# EAGLE board uc4h airspeed v0401 (EAGLE 7.5.0)
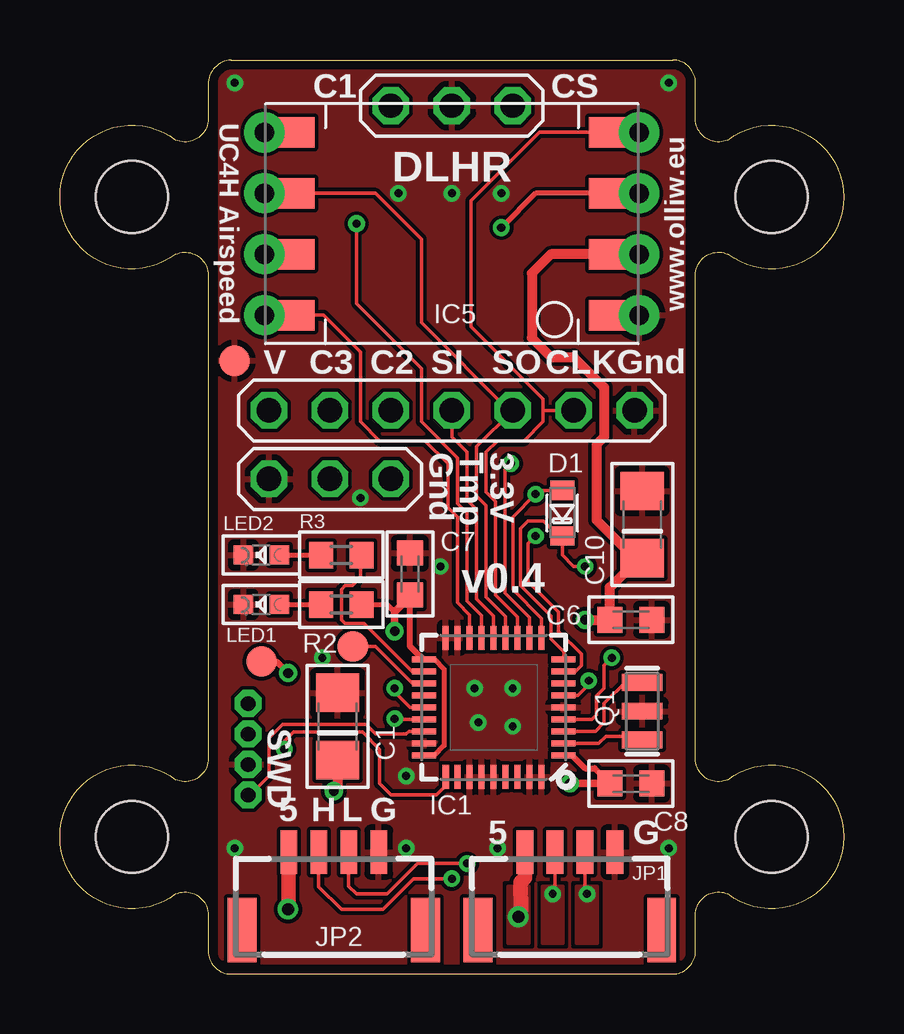
[diagram p0: board, top side]
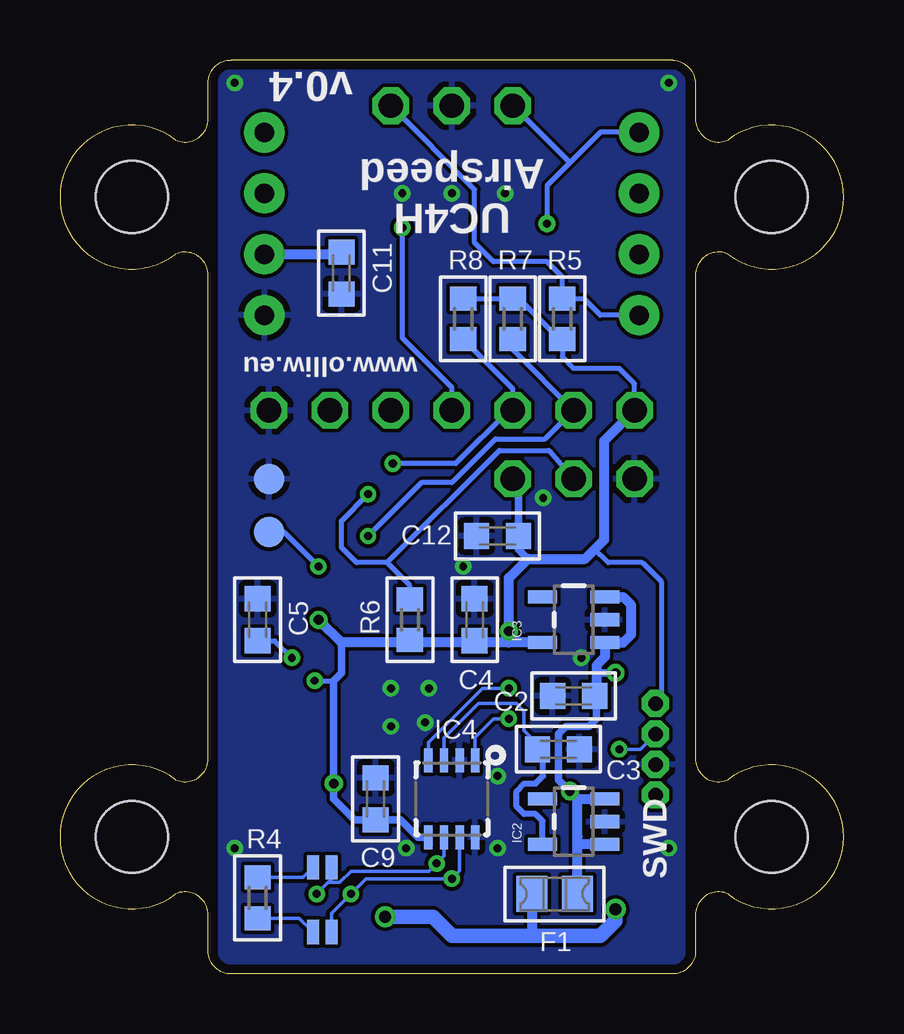
[diagram p1: board, bottom side, seen from below]

Size 32.67 x 38.1 mm. Coordinates in mm from the lower left corner, seen from the top.
Outline: 7.13,0 25.54,0 arc90 26.5,0.95 26.5,2.46 arc-114 27.84,3.33 arc255 27.84,8.1 arc-114 26.5,8.97 26.5,29.13 arc-114 27.84,30 arc255 27.84,34.77 arc-114 26.5,35.64 26.5,37.15 arc90 25.54,38.1 7.13,38.1 arc90 6.18,36.99 6.18,35.64 arc-114 4.83,34.77 arc255 4.83,30 arc-114 6.18,29.13 6.18,8.97 arc-114 4.83,8.1 arc255 4.83,3.33 arc-114 6.18,2.46 6.18,0.95 arc90 7.13,0
Copper layers (1*16): Top 0.0356mm / dielectric 1.5011mm / Bottom 0.0356mm
Design rules "ow-oshpark-2layer": minimum track width 6mil, minimum drill 13mil, track to track 6mil, track to pad 6mil, pad to pad 6mil, via to via 6mil, smd to smd 6mil, copper to edge 15mil, drill to drill 6mil, minimum pad ring 7mil, minimum via ring 7mil, stop-mask expansion 2.5mil, vias tented up to drill 26mil, thermal gap 10mil
Holes 3 mm at 3,32.38 29.67,32.38 3,5.71 29.67,5.71

## Footprints (pad centres in the part's own frame; a part is rotated, then mirrored left to right if it is on the bottom)
C1206 = smd 1.6 x 1.8: 1 -1.4,0; 2 1.4,0
C0603K = smd 1.05 x 1.08: 1 -0.875,0; 2 0.875,0
SOD110-R = smd 0.8 x 1: A 0.95,0; C -0.95,0
FUSE-0805 = smd 1.3 x 1.5: 1 -0.95,0; 2 0.95,0
VFQFPN36 = smd 1 x 0.25: 1 -2.9,2; 2 -2.9,1.5; 3 -2.9,1; 4 -2.9,0.5; 5 -2.9,0; 6 -2.9,-0.5; 7 -2.9,-1; 8 -2.9,-1.5; 9 -2.9,-2; 19 2.9,-2; 20 2.9,-1.5; 21 2.9,-1; 22 2.9,-0.5; 23 2.9,0; 24 2.9,0.5; 25 2.9,1; 26 2.9,1.5; 27 2.9,2 | smd 0.25 x 1: 10 -2,-2.9; 11 -1.5,-2.9; 12 -1,-2.9; 13 -0.5,-2.9; 14 0,-2.9; 15 0.5,-2.9; 16 1,-2.9; 17 1.5,-2.9; 18 2,-2.9; 29 1.5,2.9; 30 1,2.9; 31 0.5,2.9; 32 0,2.9; 33 -0.5,2.9; 34 -1,2.9; 35 -1.5,2.9; 36 -2,2.9 | smd 0.27 x 1: 28 2,2.9
SOT23-5 = smd 0.55 x 1.2: 1 -0.95,-1.3; 2 0,-1.3; 3 0.95,-1.3; 4 0.95,1.3; 5 -0.95,1.3
HVSON8 = smd 1 x 0.35: 1 -1.6,0.975; 2 -1.6,0.325; 3 -1.6,-0.325; 4 -1.6,-0.975; 5 1.6,-0.975; 6 1.6,-0.325; 7 1.6,0.325; 8 1.6,0.975
DLHR-8 = drill 0.813 pad 1.676: 1 -7.811,3.81; 2 -7.811,1.27; 3 -7.811,-1.27; 4 -7.811,-3.81; 5 7.811,-3.81; 6 7.811,-1.27; 7 7.811,1.27; 8 7.811,3.81 | smd 2.54 x 1.27: P$9 -6.985,3.81; P$10 -6.985,1.27; P$11 -6.985,-1.27; P$12 -6.985,-3.81; P$13 6.985,-3.81; P$14 6.985,-1.27; P$15 6.985,1.27; P$16 6.985,3.81
SM04B-GHS-TB = smd 0.7 x 1.8: 1 -1.875,4.6; 2 -0.625,4.6; 3 0.625,4.6; 4 1.875,4.6 | smd 1.2 x 2.7: FIT@1 -3.825,1.35; FIT@2 3.825,1.35
CHIPLED_0603 = smd 0.8 x 0.8: A 0,-0.75; C 0,0.75
RESONATOR-SMD = smd 0.7 x 1.7: 1 -1.2,0; 2 0,0; 3 1.2,0
R0603 = smd 1 x 1.1: 1 -0.85,0; 2 0.85,0
SJ_2S-NO = smd 0.508 x 1.016: 1 -0.381,0; 2 0.381,0
PINHEAD_3X1 = drill 1.016 octagon: 1 0,0; 2 0,-2.54; 3 0,-5.08
PINHEAD_7X1 = drill 1.016 octagon: 1 0,0; 2 0,-2.54; 3 0,-5.08; 4 0,-7.62; 5 0,-10.16; 6 0,-12.7; 7 0,-15.24
4X1_1P27_OCT_BILEX = drill 0.61 pad 1.118 octagon: 1 0,0; 2 0,-1.27; 3 0,-2.54; 4 0,-3.81
B1,27 = smd 1.27 x 1.27: TP 0,0

## Placement (x,y rotation side)
C1  10u/20V  [C1206]  11.57,10.32 90 top
C2  100n  [C0603K]  11.26,11.59 180 bottom
C3  1u  [C0603K]  11.89,9.37 0 bottom
C4  1u  [C0603K]  15.38,14.76 90 bottom
C5  100n  [C0603K]  24.43,14.76 90 bottom
C6  100n  [C0603K]  23.8,14.76 0 top
C7  100n  [C0603K]  14.59,16.67 90 top
C8  100n  [C0603K]  23.8,7.94 0 top
C9  100n  [C0603K]  19.51,7.3 90 bottom
C10  10u/10V  [C1206]  24.27,18.73 90 top
C11  100n  [C0603K]  20.94,29.21 270 bottom
C12  100n  [C0603K]  14.43,18.26 180 bottom
D1  BAT54J  [SOD110-R]  20.94,19.21 90 top
F1  0ZCK0020FF2G  [FUSE-0805]  12.05,3.33 180 bottom
IC1  STM32F103T8  [VFQFPN36]  18.08,11.11 180 top
IC2  MIC5219-5.0YM5-TR  [SOT23-5]  11.26,6.35 90 bottom
IC3  MIC5219-3.3YM5-TR  [SOT23-5]  11.26,14.76 90 bottom
IC4  TJA1051TK/3  [HVSON8]  16.34,7.3 270 bottom
IC5  DLHRDLHR-8  [DLHR-8]  16.34,31.27 180 top
JP1  JST-GH-4  [SM04B-GHS-TB]  21.26,0.48 0 top
JP2  JST-GH-4  [SM04B-GHS-TB]  11.41,0.48 0 top
LED1  red  [CHIPLED_0603]  8.4,15.4 90 top
LED2  green  [CHIPLED_0603]  8.4,17.46 90 top
Q1  CSTCE8M00G55-R0  [RESONATOR-SMD]  24.27,10.95 90 top
R2  4.7k  [R0603]  11.73,15.4 180 top
R3  1k  [R0603]  11.73,17.46 180 top
R4  120  [R0603]  24.43,3.17 90 bottom
R5  10k  [R0603]  11.73,27.3 270 bottom
R6  4.7k  [R0603]  18.08,14.76 270 bottom
R7  10k  [R0603]  13.8,27.3 90 bottom
R8  10k  [R0603]  15.86,27.3 90 bottom
SJ2  [SJ_2S-NO]  21.73,1.75 0 bottom
SJ3  [SJ_2S-NO]  21.73,4.45 0 bottom
SPI1  PINHEAD_3X1  [PINHEAD_3X1]  13.8,36.2 90 top
SPI2  PINHEAD_7X1  [PINHEAD_7X1]  8.72,23.5 90 top
SWD  PH4  [4X1_1P27_OCT_BILEX]  7.84,11.27 0 top
TEMP  PINHEAD_3X1  [PINHEAD_3X1]  13.8,20.64 270 top
TP1  TPB1,27  [B1,27]  12.21,13.65 0 top
TP2  TPB1,27  [B1,27]  7.29,25.56 0 top
TP3  TPB1,27  [B1,27]  8.4,13.02 0 top
TP4  TPB1,27  [B1,27]  23.96,18.41 0 bottom
TP5  TPB1,27  [B1,27]  23.96,20.64 0 bottom

## Library data of the parts
C1-C12 R2-R8 = rcl
D1 = diode
F1 IC4 IC5 JP1 JP2 SPI1 SPI2 SWD TEMP = # stdlib
IC1 = # stm32
IC2 IC3 Q1 SJ2 SJ3 = # SparkFun2
LED1 LED2 = led
TP1-TP5 = testpad

## Nets
3.3V: C4.1 C6.1 C7.1 C8.1 C9.1 C10.1 C11.1 C12.1 IC1.1 IC1.6 IC1.19 IC1.27 IC3.5 IC4.5 IC5.2 R2.1 R5.2 R6.2 R7.2 R8.2 SPI2.1 SWD.1 TEMP.1
5V: C3.1 IC2.5 IC4.3
A1: IC1.33
A2: IC1.34
CAN-5V: C1.1 C2.1 F1.1 IC2.1 IC2.3 IC3.1 IC3.3 TP3.TP
CAN-PWR-IN: F1.2 JP1.1 JP2.1
CANH: IC4.7 JP1.2 JP2.2 SJ2.2
CANL: IC4.6 JP1.3 JP2.3 SJ3.2
CANRX: IC1.23 IC4.4
CANTX: IC1.24 IC4.1
CS: IC1.16 IC5.8 R5.1 SPI1.3
CS2: IC1.11 R8.1 SPI2.3
CS3: IC1.8 R7.1 SPI2.2
EOC: IC1.15 IC5.5 SPI1.1
GND: C1.2 C2.2 C3.2 C4.2 C5.2 C6.2 C7.2 C8.2 C9.2 C10.2 C11.2 C12.2 IC1.5 IC1.17 IC1.18 IC1.26 IC1.30 IC1.31 IC1.32 IC1.35 IC1.36 IC2.2 IC3.2 IC4.2 IC4.8 IC5.1 JP1.4 JP2.4 LED1.C LED2.C Q1.2 SPI1.2 SPI2.7 SWD.3 TEMP.3 TP2.TP TP5.TP
LED: IC1.20 R3.1
MISO: IC1.13 IC5.6 SPI2.5
MOSI: IC1.14 IC5.3 SPI2.4
N$1: C5.1 IC1.4
N$2: LED2.A R3.2
N$4: R4.1 SJ2.1
N$5: IC1.2 Q1.1
N$6: IC1.3 Q1.3
N$7: R4.2 SJ3.1
N$9: LED1.A R2.2
RX1: IC1.22
RX2: D1.A IC1.10 R6.1 TEMP.2
SCK: IC1.12 IC5.4 SPI2.6
SWCLK: IC1.28 SWD.2
SWDIO: IC1.25 SWD.4
TX1: IC1.21 TP1.TP
TX2: D1.C IC1.9 TP4.TP

## Tracks (layer width: path | path; a pad name or v marks a point on that pad's centre or on a via)
3.3V  (via drill 0.33, 0.4)
  Top 0.152: 23,14.85 C6.1 | 14.51,15.4 C7.1 14.35,15.48 | IC1.6 21.6,11.61 22.05,12.06 v22.05,12.22
  Top 0.203: IC1.19 15.61,13.11 16.02,12.7 16.02,9.53 15.61,9.11 IC1.27 | R2.1 13.64,15.4 13.95,15.08
  Top 0.254: IC1.19 15.02,13.22 14.59,13.65 C7.1 | IC1.1 21.35,9.11 21.89,8.57 22.29,8.57 C8.1
  Top 0.305: v13.95,14.29 13.95,15.08 14.35,15.48 | C8.1 v21.26,7.94 | 22.84,14.76 C6.1
  Top 0.406: v21.89,14.76 22.84,14.76 | C6.1 22.92,16.11 24.11,17.31 C10.1 23.96,17.33 22.37,18.92 22.37,22.07 22.69,22.38 22.69,24.45 21.42,25.72 20.46,25.72 19.67,26.51 19.67,29.21 20.46,30 IC5.2
  Bottom 0.203: 15.54,13.81 15.22,13.81 | SWD.1 7.6,11.51 7.6,16.35 8.4,17.14 9.83,17.14 10.38,17.7 | v22.05,12.22 21.26,12.22 | R6.2 18.08,13.81 | SPI2.1 8.72,24.61 9.35,25.24 11.26,25.24 11.73,25.72 R5.2 11.99,26.45 12.05,26.67 13.48,28.1 13.58,27.94 R7.2 R8.2
  Bottom 0.305: 15.22,13.81 15.47,13.97 C4.1 | IC4.5 17.75,5.7 18.48,6.43 C9.1 20.38,6.43 21.26,7.3 v21.26,7.94 21.26,12.22 20.94,12.54 20.94,13.81 | TEMP.1 13.56,20.4 C12.1 13.56,17.7 13.16,17.3 | 21.34,30 C11.1
  Bottom 0.406: IC3.5 13.95,13.81 | 13.95,13.81 15.22,13.81 | 15.54,13.81 18.08,13.81 20.94,13.81 v21.89,14.76 | 13.95,13.81 v13.95,14.29 13.95,16.51 13.16,17.3 10.78,17.3 10.38,17.7 9.99,18.1 9.99,22.23 SPI2.1 | IC5.2 21.34,30
5V
  Bottom 0.152: IC4.3 16.66,9.84 15.22,11.27 13.64,11.27 13.32,10.95 13.32,10.16 12.68,9.53 12.68,9.29 C3.1
  Bottom 0.254: IC2.5 12.56,6.38 12.84,6.67 13.32,6.67 13.64,6.99 13.64,7.62 13.32,7.94 12.84,7.94 12.53,8.26 12.53,9.29
  Bottom 0.305: 12.53,9.29 C3.1
CAN-5V  (via drill 0.4)
  Top 0.254: TP3.TP 9.03,13.02 v9.51,12.54
  Top 0.406: C1.1 11.57,7.78 v11.41,7.62
  Bottom 0.305: IC2.1 10.62,5.4 | IC2.3 | v11.41,7.62 11.89,8.1 11.89,10 11.57,10.32 10.62,10.32 10.3,10.64 10.3,11.35 C2.1 10.3,11.51 | v9.51,12.54 10.3,12.54
  Bottom 0.406: IC3.3 9.19,15.71 8.87,15.4 8.87,14.13 9.19,13.81 IC3.1 9.96,13.21 10.3,12.86 10.3,12.54 10.3,11.51 | IC2.1 11.1,5.4 | 11.1,5.4 11.1,5.71 11.1,7.3 | 11.1,7.3 IC2.3 | v11.41,7.62 11.1,7.3 | F1.1 10.94,3.33 11.1,3.49 11.1,5.4
CAN-PWR-IN  (via drill 0.5)
  Top 0.152: v9.51,2.7 9.54,2.67
  Top 0.61: 9.54,2.67 JP2.1 | JP1.1 19.38,4 19.19,3.81 19.22,2.65 v19.11,2.38
  Bottom 0.406: F1.2 13,1.75 13,1.59
  Bottom 0.61: v19.11,2.38 17.13,2.38 16.34,1.59 13,1.59 10.14,1.59 9.51,2.22 v9.51,2.7
  pour Top (no thermals): 19.55,3.65 18.68,3.65 18.68,1.27 19.55,1.27
CANH  (via drill 0.33)
  Top 0.152: JP2.2 10.79,3.64 11.73,2.7 13.48,2.7 14.75,3.97 v16.34,3.97 | JP1.2 20.63,3.42 v20.54,3.33
  Bottom 0.152: IC4.7 16.01,4.29 v16.34,3.97 19.91,3.97 v20.54,3.33 21.35,2.52 SJ2.2
  pour Top (no thermals): 20.11,3.65 20.98,3.65 20.98,1.27 20.11,1.27
CANL  (via drill 0.33)
  Top 0.152: JP2.3 12.04,3.66 12.37,3.33 13.64,3.33 14.91,4.6 v16.97,4.6 | JP1.3 21.88,3.48 v21.97,3.33
  Bottom 0.152: IC4.6 16.66,4.93 v16.97,4.6 17.29,4.29 20.54,4.29 21.02,3.81 21.49,3.81 | 21.49,3.81 v21.97,3.33 | SJ3.2 21.35,3.95 21.49,3.81
  pour Top (no thermals): 21.53,3.65 22.41,3.65 22.41,1.27 21.53,1.27
CANRX  (via drill 0.33)
  Top 0.152: IC1.23 14.59,11.11 13.95,11.75 v13.95,11.91
  Bottom 0.152: IC4.4 17.31,9.66 15.07,11.91 v13.95,11.91
CANTX  (via drill 0.33)
  Top 0.152: IC1.24 13.98,10.61 v13.95,10.64
  Bottom 0.152: IC4.1 15.36,9.87 14.59,10.64 v13.95,10.64
CS
  Top 0.152: IC1.16 17.08,14.97 16.57,15.48 16.57,19.05 16.18,19.45 16.18,21.27 15.22,22.23 13.32,22.23 12.53,23.02 12.53,25.93 10.99,27.46 IC5.8
  Bottom 0.203: IC5.8 10.14,27.46 10.84,28.16 R5.1 11.73,29.05 12.37,29.69 14.59,29.69 15.38,30.48 15.38,32.7 SPI1.3
CS2  (via drill 0.34)
  Top 0.152: IC1.11 19.58,14.85 18.56,15.88 18.56,21.03 v18.8,21.27
  Bottom 0.203: v18.8,21.27 16.18,21.27 13.95,23.5 SPI2.3 13.8,24.39 R8.1
CS3  (via drill 0.33)
  Top 0.152: IC1.8 21.49,12.61 21.73,12.86 21.73,13.34 20.78,14.29 20.78,15.08 19.51,16.35 19.51,17.94 v19.83,18.26
  Bottom 0.203: v19.83,18.26 17.61,20.48 16.34,20.48 14.51,22.3 12.45,22.3 SPI2.2 13.8,26.04 R7.1
EOC  (via drill 0.34)
  Top 0.152: IC1.15 17.58,14.95 16.97,15.56 16.97,19.21 16.57,19.61 16.57,21.51 15.07,23.02 15.07,25.24 12.37,27.94 v12.37,31.27
  Bottom 0.203: IC5.5 10.14,35.08 11.41,33.81 | 11.41,33.81 12.37,32.86 v12.37,31.27 | SPI1.1 11.41,33.81
GND  (via drill 0.33)
  other vias: 17.29,11.91 17.45,10.48 18.88,10.32 18.88,11.91 14.43,8.26 14.43,5.24 18.24,5.24 7.29,5.24 25.38,5.24 10.94,13.18 14.11,32.54 18.4,32.54 7.29,37.15 25.38,37.15 15.86,16.99 12.53,19.84 16.34,32.54
  pour Bottom (isolate 0.152, rank 6): 6.65,37.78 26.02,37.78 26.02,0.16 6.65,0.16
  pour Top (isolate 0.152, rank 6): 6.65,37.78 26.02,37.78 26.02,0.16 6.65,0.16
LED
  Top 0.152: R3.1 12.53,17.41 12.53,16.51 12.21,16.19 11.89,16.19 11.73,16.03 11.73,14.76 11.89,14.61 12.68,14.61 14.68,12.61 IC1.20
MISO
  Top 0.152: IC1.13 18.58,14.9 17.76,15.72 17.76,19.53 17.37,19.92 17.37,21.99 SPI2.5 18.72,23.5 15.07,27.15 15.07,30.64 13.16,32.54 IC5.6
MOSI  (via drill 0.34)
  Top 0.152: IC1.14 18.08,14.92 17.37,15.64 17.37,19.37 16.97,19.76 16.97,21.75 16.34,22.38 SPI2.4
  Top 0.203: IC5.3 19.83,32.54 v18.4,31.11
  Bottom 0.203: SPI2.4 16.34,24.45 18.4,26.51 v18.4,31.11
N$1  (via drill 0.33)
  Top 0.152: IC1.4 22.19,10.61 22.37,10.79 22.37,11.59 22.69,11.91 22.69,12.86 v23,13.18
  Bottom 0.203: C5.1 23.72,13.89 v23,13.18
N$2
  Top 0.203: LED2.A R3.2
N$4
  Bottom 0.152: R4.1 22.69,2.33 SJ2.1
N$5
  Top 0.152: IC1.2 22.46,9.61 22.76,9.91 24.11,9.91 Q1.1
N$6
  Top 0.152: IC1.3 22.32,10.11 22.69,10.48 22.69,11.27 23.64,12.22 23.96,11.91 24.18,12.06 Q1.3
N$7
  Bottom 0.152: R4.2 22.53,4.03 SJ3.1
N$9
  Top 0.203: LED1.A R2.2
RX2  (via drill 0.33)
  Top 0.152: IC1.10 20.08,14.83 18.88,16.03 18.88,19.05 v19.83,20 19.99,20.16 21.1,20.16 D1.A
  Bottom 0.203: TEMP.2 12.29,21.83 14.35,21.83 19.03,17.14 | 19.03,17.14 20.3,17.14 20.94,17.78 20.94,18.89 v19.83,20 | R6.1 18.08,16.19 19.03,17.14
SCK
  Top 0.152: IC1.12 19.08,14.88 18.16,15.8 18.16,19.68 17.76,20.08 17.76,21.75 18.24,22.23 19.35,22.23 20.15,23.02 20.15,23.5 | IC5.4 19.99,35.08 17.13,32.23 17.13,26.99 20.15,23.97 20.15,23.5 | SPI2.6 20.15,23.5
SWCLK  (via drill 0.33)
  Top 0.152: IC1.28 16.08,7.84 15.7,7.46 13.8,7.46 13.32,7.94 13.32,9.37 12.6,10.08 9.75,10.08 9.35,9.68 v9.35,9.37
  Bottom 0.152: v9.35,9.37 8.48,9.37 SWD.2
SWDIO
  Top 0.152: IC1.25 14.54,10.11 14.43,10 13.16,10 12.76,10.4 9.27,10.4 8.72,9.84 8.72,8.26 7.92,7.46 SWD.4
TX1
  Top 0.152: IC1.21 14.7,12.11 13.16,13.65 TP1.TP
TX2  (via drill 0.33)
  Top 0.152: IC1.9 21,13.43 20.46,13.97 20.46,14.92 19.19,16.19 19.19,18.57 19.51,18.89 20.15,18.89 20.78,18.26 D1.C 20.94,17.46 21.42,16.99 v21.89,16.99
  Bottom 0.203: TP4.TP 23.32,18.41 v21.89,16.99

## Text on the board
tNames: C1 | CS | DLHR | UC4H Airspeed | www.olliw.eu | IC5 | Gnd | V | C3 | C2 | SI | SO | CLK | Gnd | Tmp | 3.3V | v0.4 | SWD | 5 | H | L | G | 5 | G
bNames: v0.4 | UC4H / Airspeed | www.olliw.eu | SWD